# Altium PCB Copy.PcbDoc
Units mil, origin at the board's own origin, x right, y up, seen from the top; angles counter-clockwise.
Board outline 2700 x 2100 mil, 2 copper layers (Top Layer, Bottom Layer); 12 components, 36 nets, 66 pads, 1 vias.
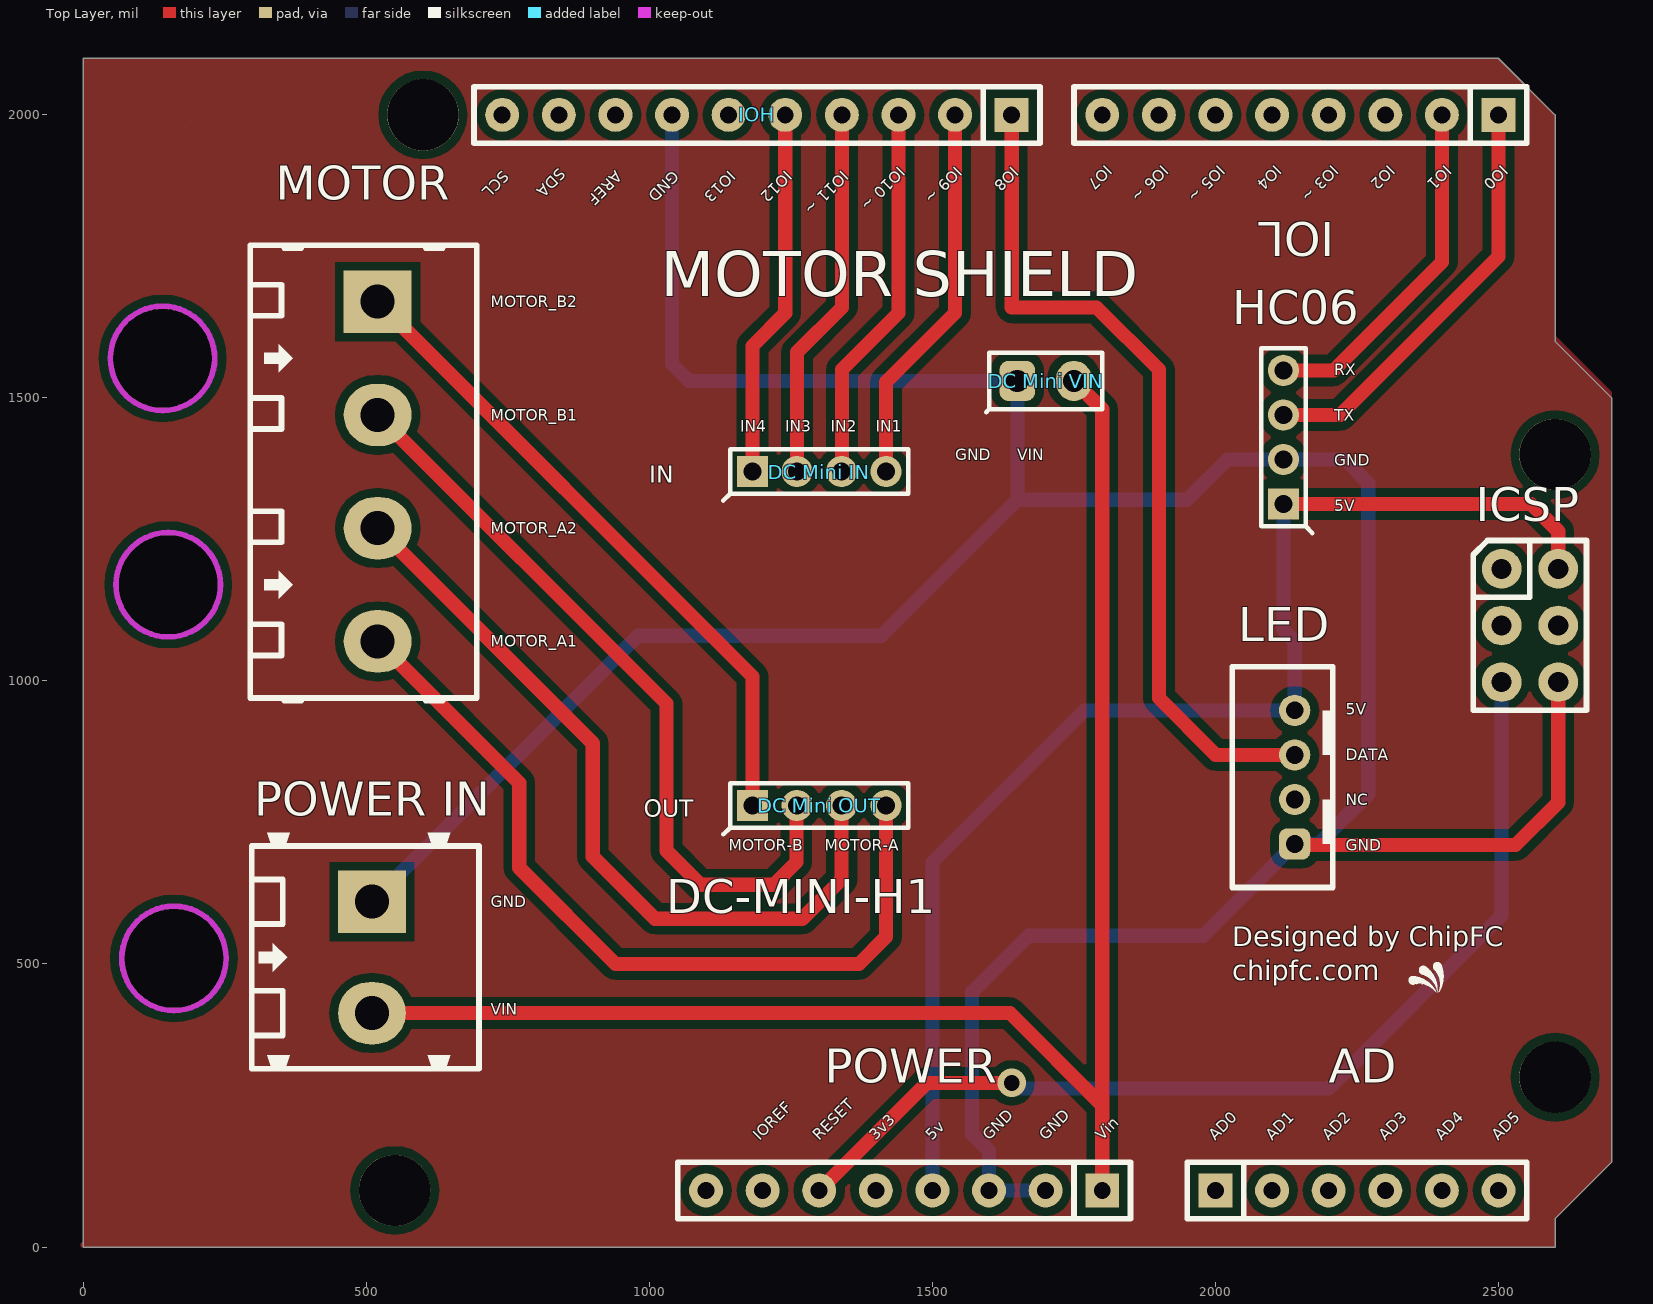
[diagram p0: Top Layer view]
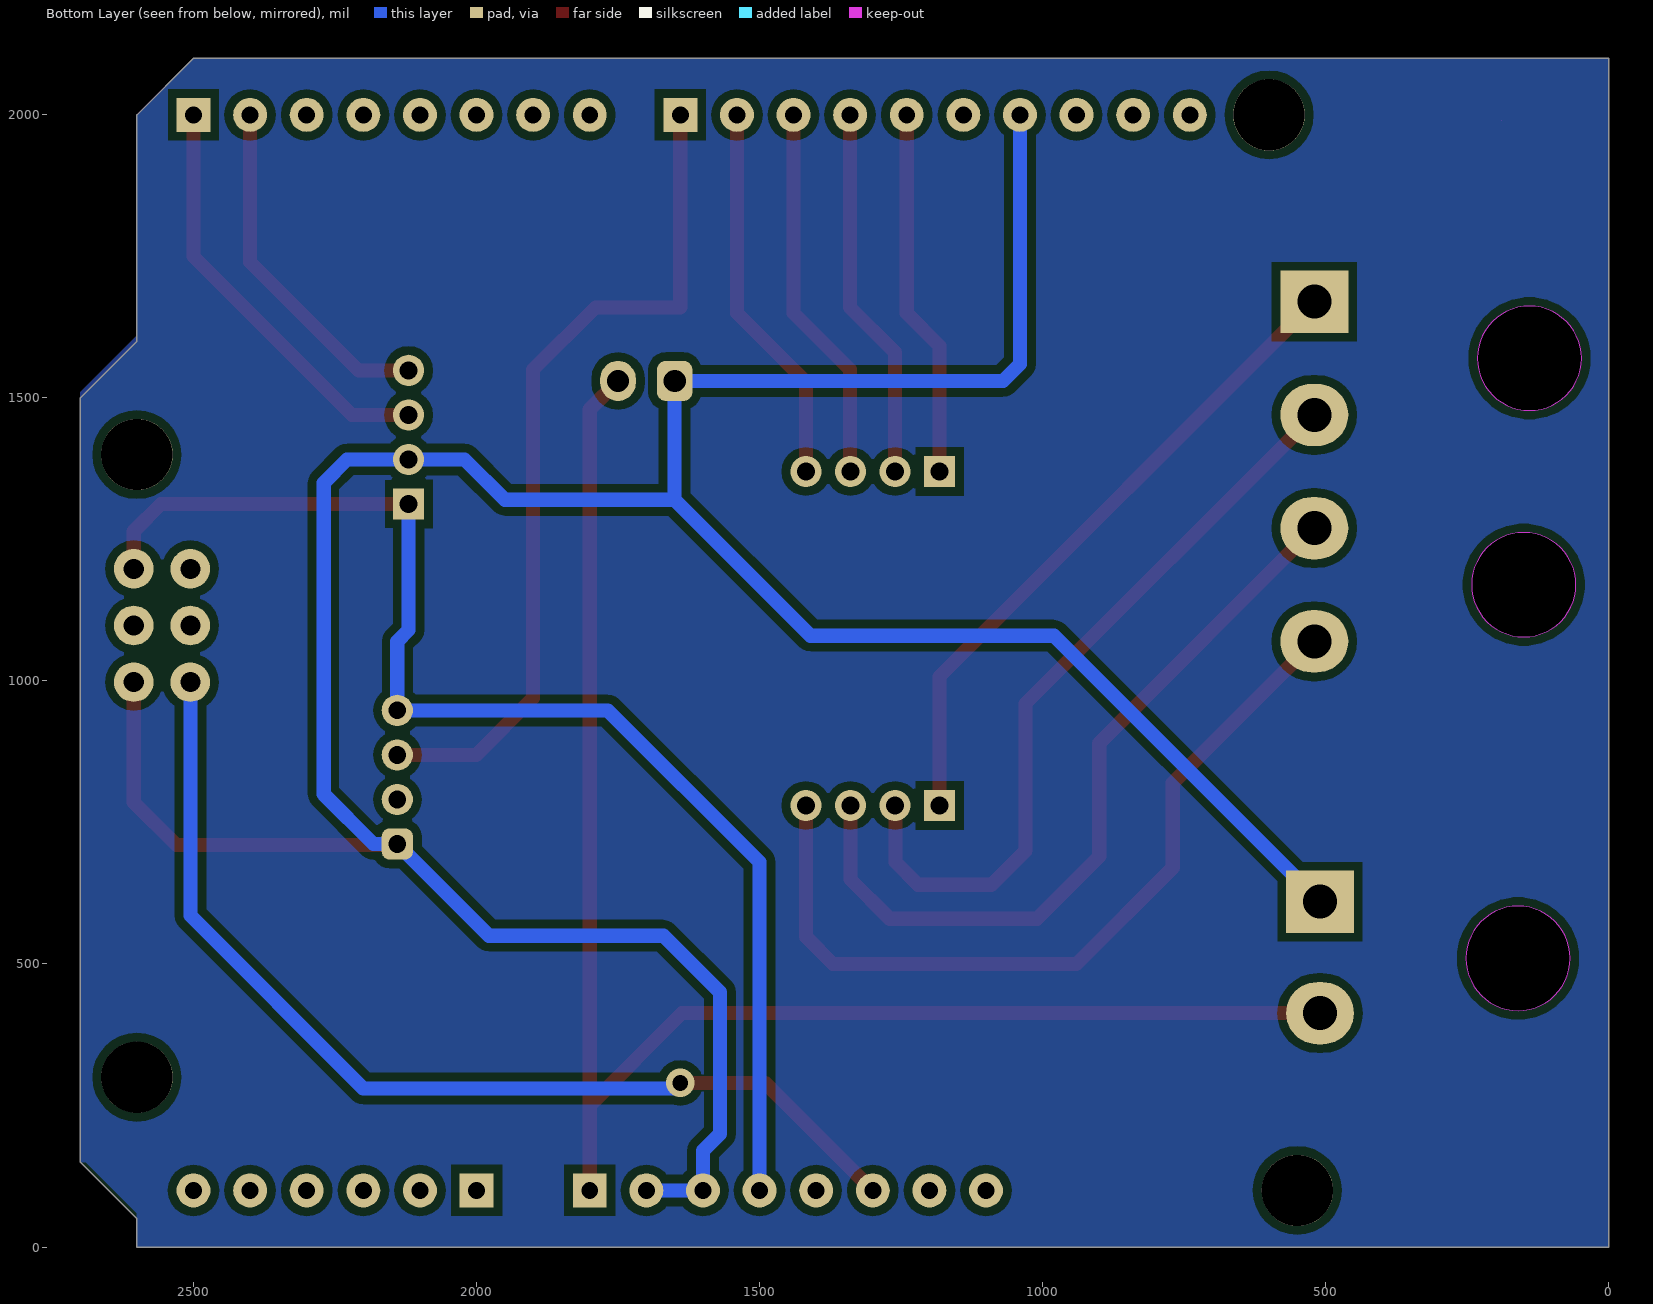
[diagram p1: Bottom Layer view, seen from below]

## Layer stack, top to bottom
Top Solder: solder mask 0.4, Solder Resist, Dk 3.5
Top Layer: signal copper 1.4
Dielectric1: dielectric 12.6, FR-4, Dk 4.8
Bottom Layer: signal copper 1.4
Bottom Solder: solder mask 0.4, Solder Resist, Dk 3.5

## Board outline
0,0 0,2100 2500,2100 2600,2000 2600,1600 2700,1500 2700,150 2600,50 2600,0
cut-out: 150,1077.8 cw(c150,1170) 57.8,1170 cw(c150,1170) 150,1262.2 cw(c150,1170) 242.2,1170 cw(c150,1170)
cut-out: 140,1477.8 cw(c140,1570) 47.8,1570 cw(c140,1570) 140,1662.2 cw(c140,1570) 232.2,1570 cw(c140,1570)
cut-out: 160,417.8 cw(c160,510) 67.8,510 cw(c160,510) 160,602.2 cw(c160,510) 252.2,510 cw(c160,510)
cut-out: 190,1990

## Design rules (kind name [scope] priority, off if disabled: settings)
Clearance [All] p1: gap=15 ignorepadtopadclearanceinfootprint=FALSE
PolygonConnect [All] p1: connectstyle=Relief reliefconductorwidth=10 reliefentries=4 polygonreliefangle="90 Angle" airgapwidth=10
RoomDefinition ArduinoUnoShield [InComponentClass('ArduinoUnoShield')] p1: confinementstyle=ConfineOut formatcopy=TRUE lockcomponents=FALSE outline 2745,-35 3335,-35 3335,430 2745,430
RoutingVias [All] p1: holewidth=28 width=50 viastyle="Through Hole" minholewidth=28 minwidth=50 maxholewidth=28 maxwidth=50
SilkToSolderMaskClearance SilkscreenOverComponentPads [IsPad] p1: minsilkscreentomaskgap=10 clearancetoexposedcopper=TRUE
SolderMaskExpansion [All] p1: expansion=4
Width [All] p1: maxlimit=100 minlimit=6 preferedwidth=25 minimp=50.000000 maximp=50.000000 favimp=50.000000
29 further rules are at their usual default settings.

## Components (designator, comment, footprint, x,y, rotation, side; value= is the part's Value field where it differs from the comment)
AD "AD" "Header 6x1 8.5mm" 2000,100 r0 top locked
"DC Mini IN" "DC Mini IN" HDR/Header/4/2mm 1300,1370 r0 top
"DC Mini OUT" "DC Mini OUT" HDR/Header/4/2mm 1300,780 r0 top
"DC Mini VIN" "DC Mini VIN" HDR/Header/2 1700,1530 r0 top
HC06 "HC06" HDR/Header/4/2mm 2120,1430.63 r90 top
ICSP "ICSP" ICSP 2505.51,1198.03 r0 top locked
IOH "IOH" "Header 10x1 8.5mm" 1640,2000 r180 top locked
IOL "IOL" "Header 8x1 8.5mm" 2500,2000 r180 top locked
LED "LED1Wire" HDR/Header/4/2mm/BOX 2140,830 r90 top
MOTOR "Motor" HDR/Terminal/4 520,1370 r270 top
POWER "POWER_UNO" "Header 8x1 8.5mm" 1800,100 r180 top locked
"POWER IN" "POWER IN" HDR/Terminal/2/5mm 510,511.57 r270 top

## Footprints (in the part's own frame and the unit in brackets; to place one, negate y for a bottom-side part, rotate by r counter-clockwise, add the part's x,y. Pads: shape width x height; smd on the part's side, far side on the other; paste and mask are expansions set on the pad)
HDR/Header/2 [mm]
  rrect50% 1.6x1.8 hole 1: 1(-1.27,0)
  oval 1.6x1.8 hole 1: 2(1.27,0)
  silkscreen extent -2.67,-1.4 2.54,1.27, body extent -2.54,-1.27 2.54,1.27, height 8.89
HDR/Header/4/2mm [mm]
  rect 1.4x1.4 hole 0.8: 1(-3,0)
  round 1.4 hole 0.8: 2(-1,0) 3(1,0) 4(3,0)
  silkscreen extent -4.3,-1.3 4,1, body extent -3.98,-1 3.97,1, height 6
HDR/Header/4/2mm/BOX [mm]
  rrect50% 1.4x1.4 hole 0.8: 1(-3,0)
  round 1.4 hole 0.8: 2(-1,0) 3(1,0) 4(3,0)
  silkscreen extent -4.95,-1.7 4.95,2.8, body extent -4.95,-1.7 4.95,2.8, height 6
HDR/Terminal/2/5mm [mil] "Header 2, 2 pin, hight 400mil, Pin to Pin 200mil, Colour Green"
  rect 110x120 hole 60: 1(-98.43,0)
  oval 110x120 hole 60: 2(98.43,0)
  silkscreen extent -220,-213 197,189, body extent -220,-215 197,191, height 559
HDR/Terminal/4 [mil]
  rect 110x120 hole 60: 1(-300,0)
  oval 110x120 hole 60: 2(-100,0) 3(100,0) 4(300,0)
  silkscreen extent -400,-225 405,175, body extent -429,-218 400,168, height 559
"Header 6x1 8.5mm" [mil] "Stackable 6 pin header"
  rect 60x60 hole 30: 1(0,0)
  round 60 hole 30: 2(100,0) 3(200,0) 4(300,0) 5(400,0) 6(500,0)
  silkscreen extent -50,-50 550,50, body extent -50,-50 550,50, height 335
"Header 8x1 8.5mm" [mil] "Stackable 8 pin header"
  rect 60x60 hole 30: 1(0,0)
  round 60 hole 30: 2(100,0) 3(200,0) 4(300,0) 5(400,0) 6(500,0) 7(600,0) 8(700,0)
  silkscreen extent -50,-50 750,50, body extent -50,-50 750,50, height 335
"Header 10x1 8.5mm" [mil] "Stackable 10 pin header"
  rect 60x60 hole 30: 1(0,0)
  round 60 hole 30: 2(100,0) 3(200,0) 4(300,0) 5(400,0) 6(500,0) 7(600,0) 8(700,0) 9(800,0) 10(900,0)
  silkscreen extent -50,-50 950,50, body extent -50,-50 950,50, height 335
ICSP [mil]
  round 70 hole 35.43: 1(0,0) 2(100,0) 3(0,-100) 4(100,-100) 5(0,-200) 6(100,-200)
  silkscreen extent -50,-250 150,50, body extent -50,-250 150,50, height 485

## Part data
AD: Supplier Part Number 1=2699089, Supplier 1=Arrow, Supplier 2=Digi-Key, Supplier 3=Arrow, Supplier 4=Arrow, Supplier Part Number 2=SAM1198-06-ND, Supplier Part Number 3=2699088, Supplier Part Number 4=2699075
"DC Mini IN" "DC Mini OUT" HC06 LED MOTOR: library part "Header 4", "Header, 4-Pin"
"DC Mini VIN" "POWER IN": library part "Header 2", "Header, 2-Pin"
ICSP: Supplier Part Number 1=2699117, Supplier 1=Arrow, Supplier 2=Arrow, Supplier 3=Digi-Key, Supplier 4=Arrow, Supplier 5=Digi-Key, Supplier Part Number 2=2699116, Supplier Part Number 3=SAM1185-06-ND, Supplier Part Number 4=2699091, Supplier Part Number 5=SAM1196-06-ND
IOH: Supplier Part Number 1=2698803S4475693N1004, Supplier 1=Arrow, Supplier 2=Digi-Key, Supplier 3=Arrow, Supplier Part Number 2=SAM1198-10-ND, Supplier Part Number 3=2698789
IOL POWER: Supplier Part Number 1=SAM1198-08-ND, Supplier 1=Digi-Key, Supplier 2=Arrow, Supplier 3=Arrow, Supplier 4=Arrow, Supplier Part Number 2=2698939, Supplier Part Number 3=2698940, Supplier Part Number 4=2698925

## Free pads (board coordinates)
  round 125.98 hole 125.98: 0(550,100) 0(600,2000) 0(2600,300) 0(2600,1400)

## Via types
v1: diameter 50, hole 28, Top Layer to Bottom Layer, 1 vias

## Nets (pads, with @x,y where several pads share a name; then routed paths per layer and width w, separated by ;. In a path a pad name is that pad's centre, name@x,y a point inside that pad or via, vN(x,y) a via of type N, cw(c..) or ccw(c..) an arc to the next point about the centre after c; other vN are vias at no path point)
3V3: POWER.5
5V: HC06.1 ICSP.2 LED.4 POWER.4 | length 2275.6
  Top Layer w25: HC06.1 2557.48,1312.52 2605.51,1264.49 ICSP.2
  Bottom Layer w25: POWER.4 1500,680 1768.11,948.11 LED.4 2140,1070 2120,1090 HC06.1
AD0: AD.1
AD1: AD.2
AD2: AD.3
AD3: AD.4
AD4: AD.5
AD5: AD.6
AREF: IOH.8
DATA: IOH.1 LED.3 | length 1507.2
  Top Layer w25: IOH.1 1640,1660 1790,1660 1900,1550 1900,970 2000.63,869.37 LED.3
DC-IN-A1: "DC Mini IN.4" IOH.2 | length 680.5
  Top Layer w25: 1418.11,1370 1418.11,1528.11 1540,1650 IOH.2
DC-IN-A2: "DC Mini IN.3" IOH.3 | length 671.7
  Top Layer w25: 1339.37,1370 1340,1370.63 1340,1550 1440,1650 IOH.3
DC-IN-B1: "DC Mini IN.2" IOH.4 | length 662.9
  Top Layer w25: 1260.63,1370 1260.63,1580.63 1340,1660 IOH.4
DC-IN-B2: "DC Mini IN.1" IOH.5 | length 654.1
  Top Layer w25: 1181.89,1370 1181.89,1591.89 1240,1650 IOH.5
DC_OUT_MOTOR_A1: "DC Mini OUT.4" MOTOR.4 | length 1473.9
  Top Layer w25: MOTOR.4 770,820 770,670 940,500 1370,500 1418.11,548.11 1418.11,780
DC_OUT_MOTOR_A2: "DC Mini OUT.3" MOTOR.3 | length 1381.7
  Top Layer w25: MOTOR.3 900,890 900,690 1010,580 1270,580 1339.37,649.37 1339.37,780
DC_OUT_MOTOR_B1: "DC Mini OUT.2" MOTOR.2 | length 1352.9
  Top Layer w25: MOTOR.2 1030,960 1030,700 1090,640 1220,640 1260,680 1260,779.37 1260.63,780
DC_OUT_MOTOR_B2: "DC Mini OUT.1" MOTOR.1 | length 1164.2
  Top Layer w25: MOTOR.1 1181.89,1008.11 1181.89,780
GND: "DC Mini VIN.1" "POWER IN.1" HC06.2 ICSP.6 IOH.7 LED.1 POWER.2 POWER.3 | length 5960
  Top Layer w25: LED.1@2153.68,725.57 LED.1 2141.89,710 2530,710 2605.51,785.51 ICSP.6
  Bottom Layer w25: 510,610 980,1080 1410,1080 1650,1320 ; IOH.7 1040,1560 1070,1530 1650,1530 1650,1320 ; POWER.2 POWER.3 1600,170 1570,200 1570,450 1670,550 1978.11,550 LED.1 2181.89,711.89 2270,800 2270,1350 2228.74,1391.26 HC06.2 2021.26,1391.26 1950,1320 1650,1320
HC06-RX: HC06.4 IOL.2 | length 619.2
  Top Layer w25: HC06.4 2208.74,1548.74 2400,1740 IOL.2
HC06-TX: HC06.3 IOL.1 | length 746
  Top Layer w25: HC06.3 2220,1470 2500,1750 IOL.1
IO2: IOL.3
IO3: IOL.4
IO4: IOL.5
IO5: IOL.6
IO6: IOL.7
IO7: IOL.8
IO13: IOH.6
IOREF: POWER.7
MISO: ICSP.1
MOSI: ICSP.4
RESET: ICSP.5 POWER.6 | length 1827.4
  Top Layer w25: POWER.6 1490,290 v1(1640,290)
  Bottom Layer w25: v1(1640,290) 1650,280 2200,280 2505.51,585.51 ICSP.5
SCK: ICSP.3
SCL: IOH.10
SDA: IOH.9
VIN: "DC Mini VIN.2" "POWER IN.2" POWER.1 | length 2808.3
  Top Layer w25: 510,413.15 1636.85,413.15 1800,250 ; 1750,1530 1800,1480 1800,250 ; POWER.1 1800,250
pads on no net: LED.2 POWER.8

## Polygon pours and split planes (outlines as drawn)
no net on Top Layer "Top Layer-No Net" (solid, pour order 27): 0,2100 2500,2100 2600,2000 2600,1610 2700,1510 2700,150 2600,50 2600,0 -10,0 0,10
no net on Top Layer "Top Layer-No Net 1" (solid, pour order 17): -10,2110
GND on Top Layer "Top Layer-No Net1" (solid, remove dead copper, pour order 16): 0,2100
no net on Top Layer "NONET_L01_P008" (solid, pour order 8): 0,2100
no net on Bottom Layer "Bottom Layer-No Net" (solid, pour order 23): 0,2100 2500,2100 2600,2000 2600,1610 2700,1510 2700,150 2690,150 2600,60 2600,0 0,0
no net on Bottom Layer "Bottom Layer-No Net 1" (solid, pour order 25): 190,1870

## Keep-outs
Top Layer:
  circle w10: c140,1570 r92.2
  circle w10: c160,510 r92.2
  circle w10: c150,1170 r92.2

## Silkscreen, mask and mechanical layers (free items; w line width, h text height)
Top Overlay:
  drawing of 3 lines, arcs and shapes, not listed
  text "IO7" at 1805,1912.93 h20 r225
  text "IO6 ~" at 1905,1912.93 h20 r225
  text "IO5 ~" at 2005,1912.93 h20 r225
  text "IO4" at 2105,1912.93 h20 r225
  text "IO3 ~" at 2205,1912.93 h20 r225
  text "IO2" at 2305,1912.93 h20 r225
  text "IO1" at 2405,1912.93 h20 r225
  text "IO0" at 2505,1912.93 h20 r225
  text "IO10 ~" at 1440,1910 h20 r225
  text "IO9 ~" at 1540,1910 h20 r225
  text "IO8" at 1640,1910 h20 r225
  text "SDA" at 840,1907.93 h20 r225
  text "SCL" at 740,1902.93 h20 r225
  text "AREF" at 940,1902.93 h20 r225
  text "GND" at 1040,1902.93 h20 r225
  text "IO13" at 1140,1902.93 h20 r225
  text "IO12" at 1240,1902.93 h20 r225
  text "IO11 ~" at 1340,1902.93 h20 r225
  text "MOTOR SHIELD" at 1020,1680 h80
  text "MOTOR_B2" at 720,1660 h20
  text "RX" at 2210,1540 h20
  text "MOTOR_B1" at 720,1460 h20
  text "TX" at 2210,1460 h20
  text "IN4" at 1160.63,1440 h20
  text "IN3" at 1240,1440 h20
  text "IN2" at 1320,1440 h20
  text "IN1" at 1400,1440 h20
  text "GND" at 1540,1390 h20
  text "VIN" at 1650,1390 h20
  text "GND" at 2210,1380 h20
  text "IN" at 1000,1350 h30
  text "5V" at 2210,1300 h20
  text "MOTOR_A2" at 720,1260 h20
  text "MOTOR_A1" at 720,1060 h20
  text "5V" at 2230,940 h20
  text "DATA" at 2230,860 h20
  text "NC" at 2230,780 h20
  text "OUT" at 990,760 h30
  text "MOTOR-B" at 1140,700 h20
  text "MOTOR-A" at 1310,700 h20
  text "GND" at 2230,700 h20
  text "GND" at 720,600 h20
  text "DC-MINI-H1" at 1030,590 h60
  text "Designed by ChipFC" at 2030,520 h60
  text "chipfc.com" at 2030,460 h60
  text "VIN" at 720,410 h20
  text "IOREF" at 1195,187.07 h20 r45
  text "RESET" at 1300,187.07 h20 r45
  text "3v3" at 1400,187.07 h20 r45
  text "5v" at 1500,187.07 h20 r45
  text "GND" at 1600,187.07 h20 r45
  text "GND" at 1700,187.07 h20 r45
  text "Vin" at 1800,187.07 h20 r45
  text "AD0" at 2000,187.07 h20 r45
  text "AD1" at 2100,187.07 h20 r45
  text "AD2" at 2200,187.07 h20 r45
  text "AD3" at 2300,187.07 h20 r45
  text "AD4" at 2400,187.07 h20 r45
  text "AD5" at 2500,187.07 h20 r45
  text "RESET" at 1295,-2515 h20 r45
  text "3v3" at 1395,-2515 h20 r45
  text "5v" at 1495,-2515 h20 r45
  text "GND" at 1595,-2515 h20 r45
  text "GND" at 1695,-2515 h20 r45
  text "Vin" at 1795,-2515 h20 r45
Mechanical 1:
  circle w5: c600,2000 r62.99
  circle w5: c2600,300 r62.99
  circle w5: c550,100 r62.99
  circle w5: c2600,1400 r62.99